# Altium PCB LIMIT_SW_Breakout.pcbdoc (part 1 of 5)
Units mm, origin at the board's own origin, x right, y up, seen from the top; angles counter-clockwise.
Board outline 23.88 x 98.5 mm, 2 copper layers (Top Layer, Bottom Layer), stack 0.533 mm thick; 22 components, 15 nets, 4975 pads, 0 vias.
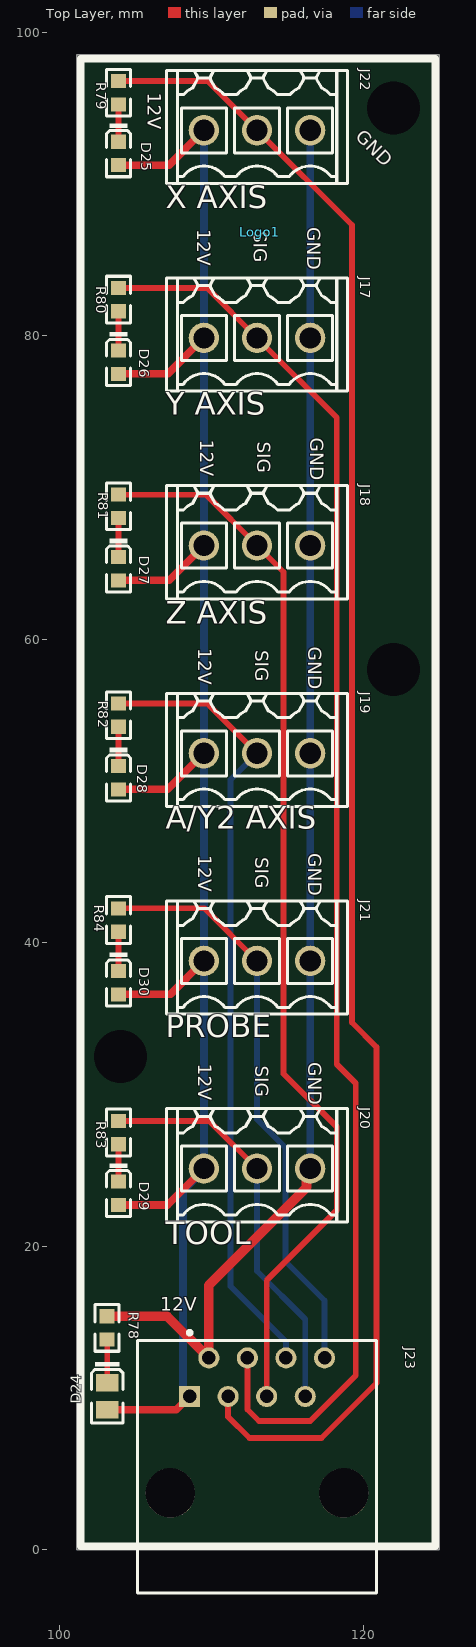
[diagram p0: Top Layer view]
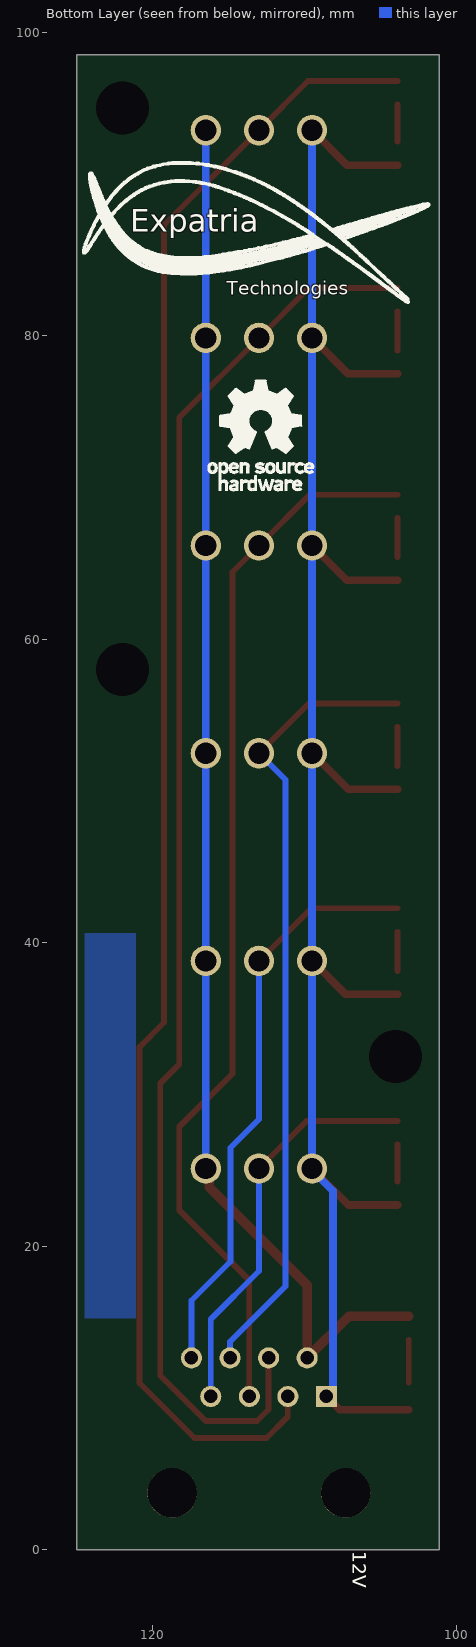
[diagram p1: Bottom Layer view, seen from below]
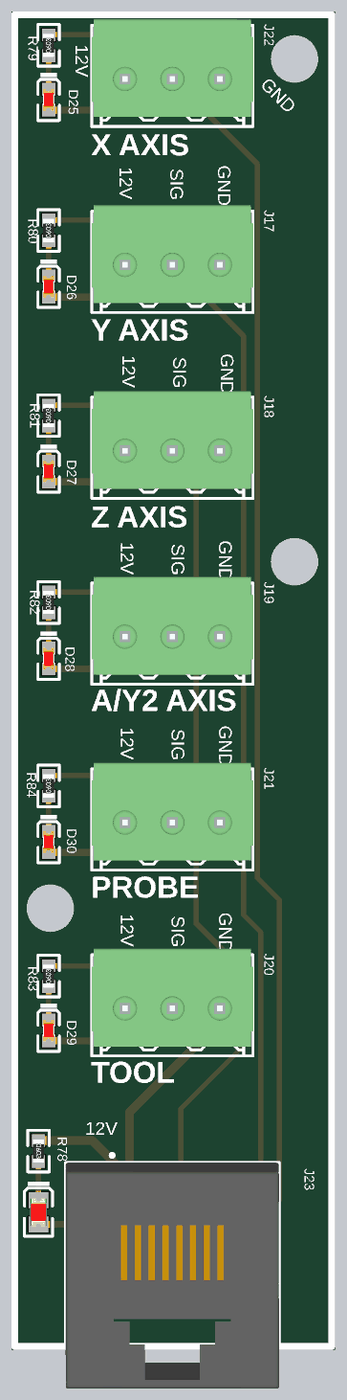
[diagram p6: 3D render of the assembled board from above, using the file's embedded part models]

## Layer stack, top to bottom
Top Solder: solder mask 0.0102, Solder Resist, Dk 3.5
Top Layer: signal copper 0.0356
Dielectric 3: prepreg 0.0711, PP-006, Dk 4.1
Dielectric1: dielectric 0.32, FR-4, Dk 4.8
Dielectric 4: prepreg 0.0711, PP-006, Dk 4.1
Bottom Layer: signal copper 0.0356
Bottom Solder: solder mask 0.0102, Solder Resist, Dk 3.5

## Board outline
101.125,0 101.125,98.5 125,98.5 125,0

## Design rules (kind name [scope] priority, off if disabled: settings)
BoardOutlineClearance [OnLayer('Top Layer')] p1: gap=0.508 ignorepadtopadclearanceinfootprint=FALSE
BoardOutlineClearance BoardOutlineClearance_3 [OnLayer('GND')] p2: gap=0.508 ignorepadtopadclearanceinfootprint=FALSE
BoardOutlineClearance BoardOutlineClearance_2 [OnLayer('PWR')] p3: gap=0.508 ignorepadtopadclearanceinfootprint=FALSE
BoardOutlineClearance BoardOutlineClearance_1 [OnLayer('Bottom Layer')] p4: gap=0.508 ignorepadtopadclearanceinfootprint=FALSE
Clearance [All] p1: gap=0.254 ignorepadtopadclearanceinfootprint=TRUE except(0: SMDPad-Hole Fill-Hole Poly-Hole Region-Hole Text-Hole; 0.203: SMDPad-Fill SMDPad-Poly SMDPad-Region THPad-Fill THPad-Poly THPad-Region Via-Fill Via-Poly Via-Region; 0.305: SMDPad-Via THPad-Via; 0.5: THPad-Hole Via-Hole; 0.508: SMDPad-SMDPad SMDPad-THPad THPad-THPad)
Clearance "Pad Clearance" [IsPad vs IsPad] p2: gap=0.254 ignorepadtopadclearanceinfootprint=TRUE except(0: Arc-Hole Track-Hole SMDPad-Hole THPad-Hole Via-Hole Fill-Hole Poly-Hole Region-Hole Text-Hole; 0.203: Arc-Arc Arc-Track Arc-Fill Arc-Poly Arc-Region Track-Track Track-Fill Track-Poly Track-Region SMDPad-Fill SMDPad-Poly SMDPad-Region THPad-Fill THPad-Poly THPad-Region Via-Fill Via-Poly Via-Region; 0.305: SMDPad-Via THPad-Via; 0.508: SMDPad-SMDPad SMDPad-THPad THPad-THPad)
DiffPairsRouting [All] p1: maxlimit=0.254 minlimit=0.203 mostfreqgap=0.203 toplayer_minwidth=0.152 toplayer_maxwidth=0.381 toplayer_prefwidth=0.254 bottomlayer_minwidth=0.152 bottomlayer_maxwidth=0.381 bottomlayer_prefwidth=0.254 maxuncoupledlength=12.7
HoleSize [All] p1: absolutevalues=TRUE maxlimit=5.08 minlimit=0.025 maxpercent=80.000 minpercent=20.000
MinimumAnnularRing [All] p1: minimumring=0.16
MinimumSolderMaskSliver [All] p1: minsoldermaskwidth=0.127
PolygonConnect [All] p1: connectstyle=Relief reliefconductorwidth=0.254 reliefentries=4 polygonreliefangle="90 Angle" airgapwidth=0.254
RoutingVias [All] p1: holewidth=0.711 width=1.27 viastyle="Through Hole" minholewidth=0.711 minwidth=1.27 maxholewidth=0.711 maxwidth=1.27 useviatemplates=TRUE viatemplateguid#1={29321985-CF2A-4769-A0B6-67998678A9C6} viatemplatename#1=v70h35m0mx0
SilkToSolderMaskClearance SilkscreenOverComponentPads [IsPad] p1: minsilkscreentomaskgap=0.254 clearancetoexposedcopper=TRUE
SolderMaskExpansion [All] p1: expansion=0.102 istentingtop=FALSE
ViasUnderSMD [All] p1: allowed=FALSE
Width [All] p1: maxlimit=5.08 minlimit=0.254 preferedwidth=0.254 minimp=50.000000 maximp=50.000000 favimp=50.000000
26 further rules are at their usual default settings.

## Components (designator, comment, footprint, x,y, rotation, side; value= is the part's Value field where it differs from the comment)
D24 "0805 Green" 0805_LED_S1 103.125,10.125 r270 top
D25 "0603 Yellow" 0603_LED_S1 103.875,92 r270 top
D26 "0603 Yellow" 0603_LED_S1 103.875,78.25 r270 top
D27 "0603 Yellow" 0603_LED_S1 103.875,64.645 r270 top
D28 "0603 Yellow" 0603_LED_S1 103.875,50.875 r270 top
D29 "0603 White" 0603_LED_S1 103.875,23.5 r270 top
D30 "0603 White" 0603_LED_S1 103.875,37.375 r270 top
J17 "" SL_3_50_180G_03 113,80.069 r0 top
J18 "" SL_3_50_180G_03 113,66.388 r0 top
J19 "" SL_3_50_180G_03 113,52.707 r0 top
J20 "" SL_3_50_180G_03 113,25.345 r0 top
J21 "" SL_3_50_180G_03 113,39.026 r0 top
J22 "" SL_3_50_180G_03 113,93.75 r0 top
J23 "5555799-1" FP-5555799-1-MFG 113,5.47 r0 top
Logo1 "Expatria Technologies" Expatria-Logo -1014.621,1193.215 r180 top value="Expatria Logo"
R78 "10KΩ ±1%" 0603_R 103.125,14.625 r270 top
R79 "2KΩ ±1%" 0603_R 103.875,96 r90 top
R80 "2KΩ ±1%" 0603_R 103.875,82.375 r90 top
R81 "2KΩ ±1%" 0603_R 103.875,68.75 r90 top
R82 "2KΩ ±1%" 0603_R 103.875,55 r90 top
R83 "2KΩ ±1%" 0603_R 103.875,27.5 r90 top
R84 "2KΩ ±1%" 0603_R 103.875,41.5 r90 top

## Footprints (in the part's own frame and the unit in brackets; to place one, negate y for a bottom-side part, rotate by r counter-clockwise, add the part's x,y. Pads: shape width x height; smd on the part's side, far side on the other; paste and mask are expansions set on the pad)
0603_LED_S1 [mm]
  rect 0.93x0.98 smd: A(0.77,0) K(-0.77,0)
  silkscreen extent -1.98,-0.79 1.54,0.79, body extent -0.8,-0.4 0.8,0.4, height 0.6
0603_R [mm]
  rect 0.93x0.98 smd: 1(-0.77,0) 2(0.77,0)
  silkscreen extent -1.53,-0.79 1.54,0.79, body extent -0.85,-0.4 0.85,0.4, height 0.56
0805_LED_S1 [mm]
  rect 1.16x1.47 smd: A(0.89,0) K(-0.89,0)
  silkscreen extent -2.24,-1.04 1.77,1.03, body extent -1.01,-0.62 1.01,0.62, height 1.1
Expatria-Logo [mil] "Expatria DXF logo"